# Altium PCB ArmPCB.PcbDoc
Units mil, origin at the board's own origin, x right, y up, seen from the top; angles counter-clockwise.
Board outline 2870 x 2610 mil, 2 copper layers (Top Layer, Bottom Layer); 78 components, 52 nets, 276 pads, 80 vias.
Unrouted connection lines stored in the file: 19.
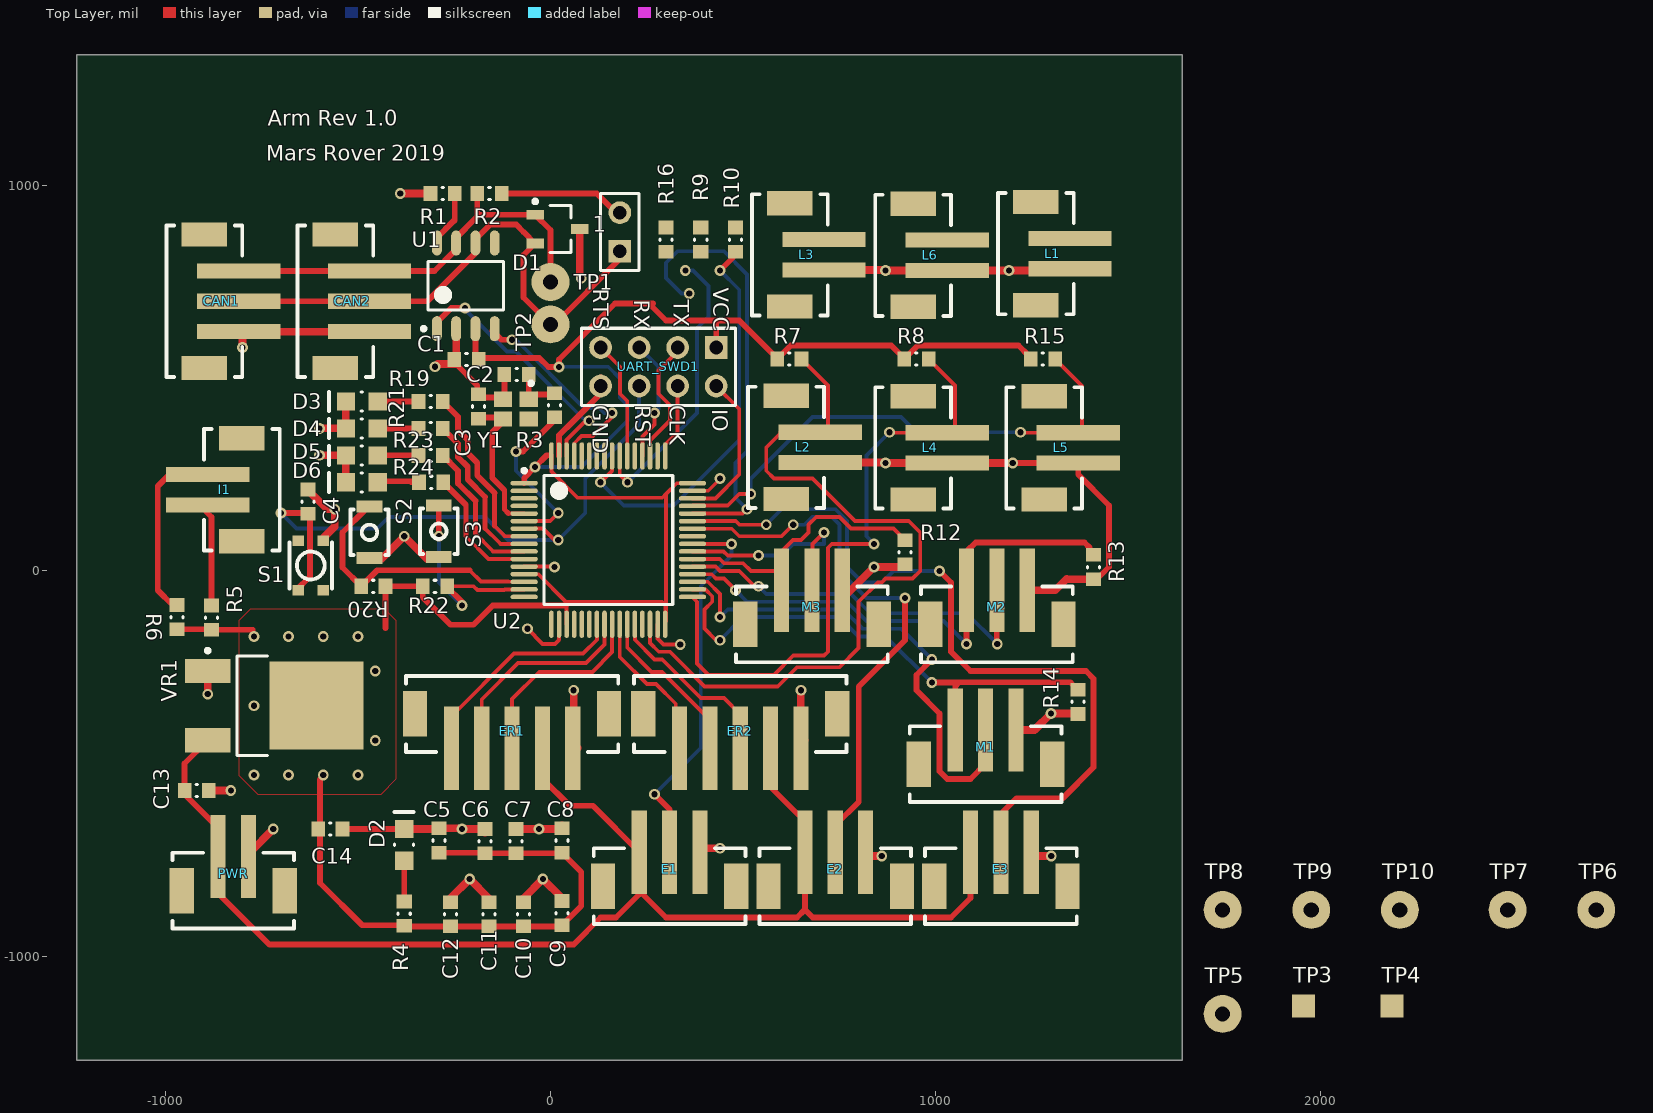
[diagram p0: Top Layer view]
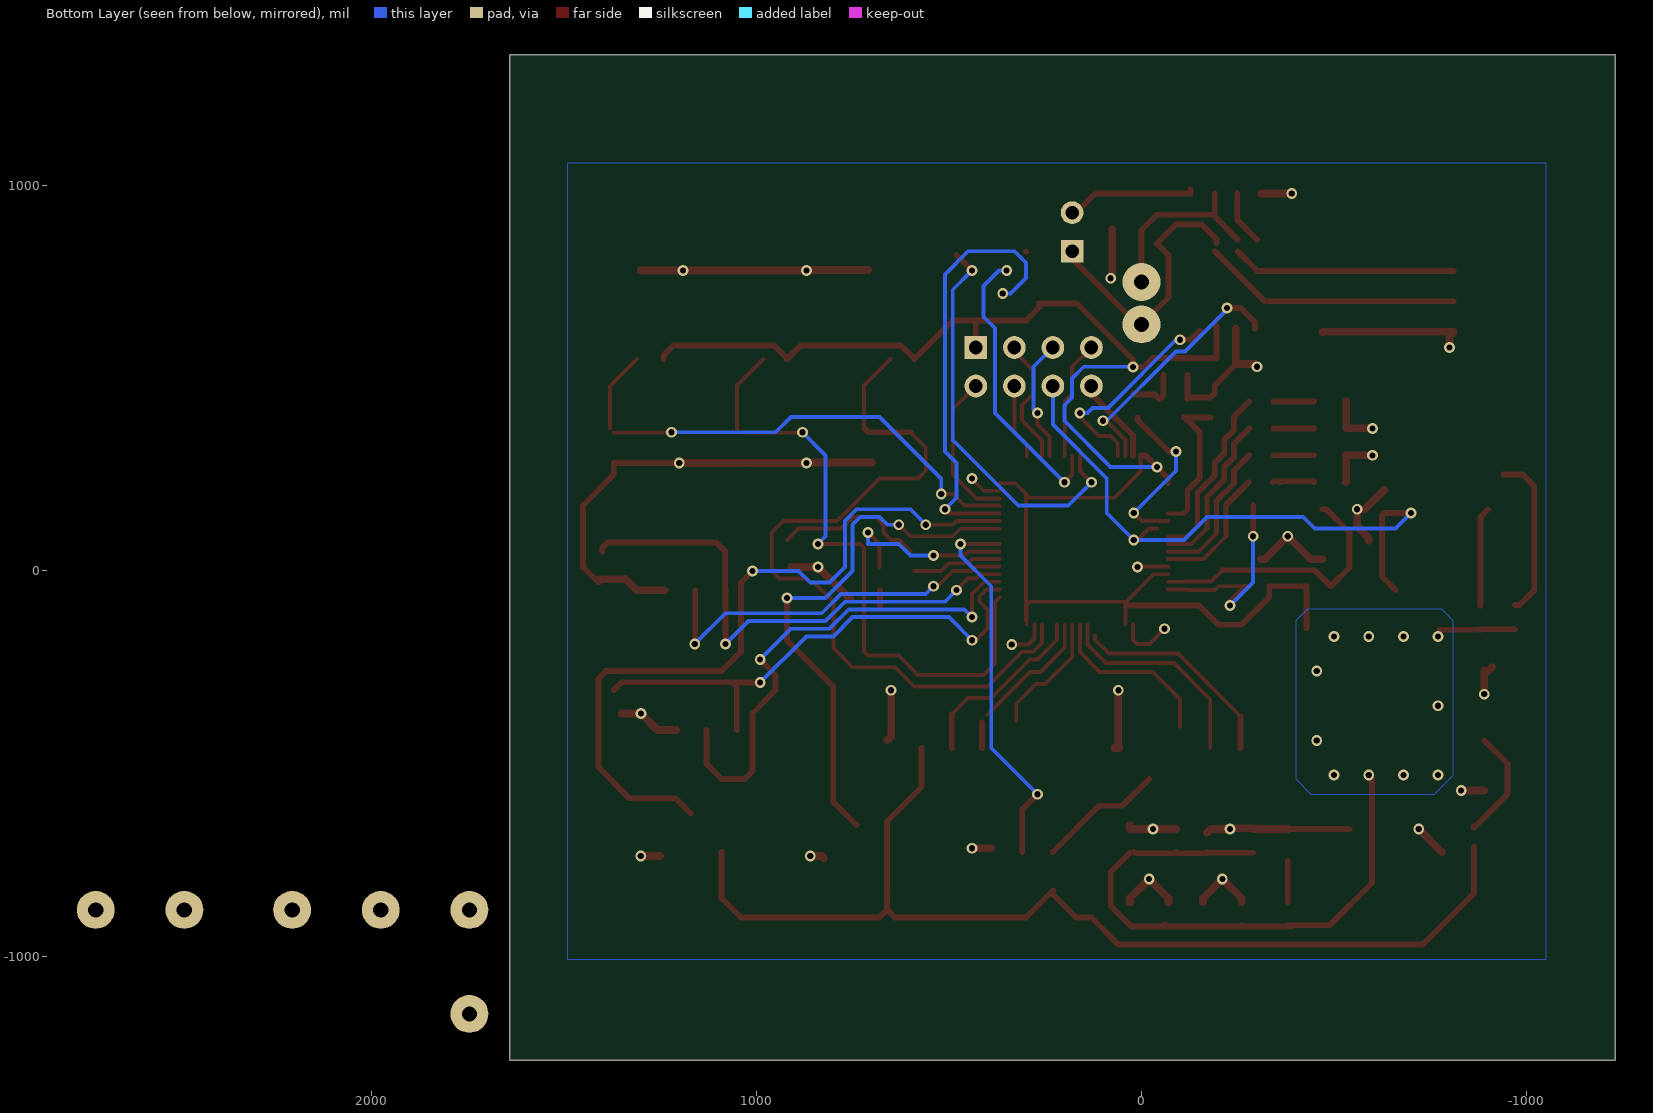
[diagram p1: Bottom Layer view, seen from below]

## Layer stack, top to bottom
Top Solder: solder mask 0.4, Solder Resist, Dk 3.5
Top Layer: signal copper 1.4
Dielectric 1: dielectric 12.6, FR-4, Dk 4.8
Bottom Layer: signal copper 1.4
Bottom Solder: solder mask 0.4, Solder Resist, Dk 3.5

## Board outline
-1230,-1270 1640,-1270 1640,1340 -1230,1340

## Design rules (kind name [scope] priority, off if disabled: settings)
Clearance [All] p1: gap=10 ignorepadtopadclearanceinfootprint=FALSE except(0: Arc-Hole Track-Hole SMDPad-Hole THPad-Hole Via-Hole Fill-Hole Poly-Hole Region-Hole Text-Hole; 8: Arc-SMDPad Track-SMDPad)
HoleSize [All] p1: absolutevalues=TRUE maxlimit=120 minlimit=1 maxpercent=80.000 minpercent=20.000
MinimumSolderMaskSliver [All] p1: minsoldermaskwidth=1
PolygonConnect [All] p1: connectstyle=Direct reliefconductorwidth=10 reliefentries=4 polygonreliefangle="90 Angle" airgapwidth=10
RoutingVias [All] p1: holewidth=28 width=50 viastyle="Through Hole" minholewidth=16 minwidth=28 maxholewidth=28 maxwidth=50
SilkToSolderMaskClearance [IsPad] p1: minsilkscreentomaskgap=5 clearancetoexposedcopper=TRUE
SolderMaskExpansion [All] p1: expansion=4
Width [All] p1: maxlimit=20 minlimit=10 preferedwidth=15 bottomlayer_maxwidth=10 bottomlayer_prefwidth=10 minimp=50.000000 maximp=50.000000 favimp=50.000000
27 further rules are at their usual default settings.

## Classes and differential pairs
component class POWER: C13 C14 D2 R4 TP3 TP4 TP5 VR1
component class Support: D3 D4 D5 D6 R5 R6 R7 R8 R9 R10 R12 R13 R14 R15 R16 R19 R20 R21 R22 R23 R24 S2 S3 TP3 TP6 TP7 TP8 TP9 TP10
component class MCU: C2 C3 C4 C5 C6 C7 C8 C9 C10 C11 C12 R3 S1 U2 Y1
component class Connectors: CAN1 CAN2 E1 E2 E3 ER1 ER2 I1 I2C L1 L1A L1B L2 L2A L2B L3 L3A L3B L4 L5 L6 M1 M2 M3 PWR PWR3 PWR5
component class CAN: 1 C1 D1 R1 R2 TP1 TP2 TP? U1 U3

## Components (designator, comment, footprint, x,y, rotation, side; value= is the part's Value field where it differs from the comment)
1 "Header 2" HDR1X2 180,830 r90 top
C1 "CAP_0.1uF_16V_0603" CAPC0603(1608)55_N -218.19,548.9 r0 top value=0.1uF
C2 "CAP_15pF_0603" CAPC0603(1608)55_N -88.27,509.53 r0 top value=15pF
C3 "CAP_15pF_0603" CAPC0603(1608)55_N -186.69,426.85 r270 top value=15pF
C4 "CAP_0.1uF_16V_0603" CAPC0603(1608)55_N -630,180 r270 top value=0.1uF
C5 "CAP_0.1uF_16V_0603" CAPC0603(1608)55_N -290,-700 r270 top value=0.1uF
C6 "CAP_0.1uF_16V_0603" CAPC0603(1608)55_N -170,-701.5 r270 top value=0.1uF
C7 "CAP_0.1uF_16V_0603" CAPC0603(1608)55_N -90,-701.5 r270 top value=0.1uF
C8 "CAP_4.7uF_0603" CAPC0603(1608)55_N 30,-700 r270 top value=4.7uF
C9 "CAP_0.1uF_16V_0603" CAPC0603(1608)55_N 30,-888.5 r270 top value=0.1uF
C10 "CAP_0.1uF_16V_0603" CAPC0603(1608)55_N -70,-891.5 r270 top value=0.1uF
C11 "CAP_10nF_0603" CAPC0603(1608)55_N -160,-891.5 r270 top value=10nF
C12 "CAP_1uF_16V_0603" CAPC0603(1608)55_N -260,-891.5 r270 top value=1uF
C13 "CAP_0.33uF_16V_0603" CAPC0603(1608)55_N -918.5,-570 r180 top value=0.33uF
C14 "CAP_10uF_0603_POL" CAPC0603(1608)55_N -571.5,-670 r0 top value=10uF
CAN1 "CON_3M_PH_TOP_SMT" JST-B3B-SM4-TB -997.01,700 r270 top
CAN2 "CON_3M_PH_TOP_SMT" JST-B3B-SM4-TB -657.01,700 r270 top
D1 "TVS_DIODE_CAN" TVS_DIODE_CAN 18.07,887.4 r0 top
D2 "DIO_LED_R" LED_0805_LINE -380,-711.34 r90 top
D3 "DIO_LED_Y" LED_0805_LINE -490,440 r180 top
D4 "DIO_LED_G" LED_0805_LINE -490,370 r180 top
D5 "DIO_LED_G" LED_0805_LINE -490,300 r180 top
D6 "DIO_LED_G" LED_0805_LINE -490,230 r180 top
E1 "CON_3M_PH_TOP_SMT" JST-B3B-SM4-TB 309.25,-917.01 r0 top
E2 "CON_3M_PH_TOP_SMT" JST-B3B-SM4-TB 739.25,-917.01 r0 top
E3 "CON_3M_PH_TOP_SMT" JST-B3B-SM4-TB 1169.25,-917.01 r0 top
ER1 "CON_5M_PH_TOP_SMT" JST-B5B-SM4-TB -100,-272.99 r180 top
ER2 "CON_5M_PH_TOP_SMT" JST-B5B-SM4-TB 492.52,-272.99 r180 top
I1 "CON_2M_PH_TOP_SMT" JST-B2B-SM4-TB -702.99,210.63 r90 top
L1 "CON_2M_PH_TOP_SMT" JST-B2B-SM4-TB 1161.57,823.86 r270 top
L2 "CON_2M_PH_TOP_SMT" JST-B2B-SM4-TB 512.99,320.63 r270 top
L3 "CON_2M_PH_TOP_SMT" JST-B2B-SM4-TB 522.99,820.63 r270 top
L4 "CON_2M_PH_TOP_SMT" JST-B2B-SM4-TB 842.99,319.37 r270 top
L5 "CON_2M_PH_TOP_SMT" JST-B2B-SM4-TB 1182.99,319.37 r270 top
L6 "CON_2M_PH_TOP_SMT" JST-B2B-SM4-TB 842.99,819.37 r270 top
M1 "CON_3M_PH_TOP_SMT" JST-B3B-SM4-TB 1129.49,-600 r0 top
M2 "CON_3M_PH_TOP_SMT" JST-B3B-SM4-TB 1158.74,-237.01 r0 top
M3 "CON_3M_PH_TOP_SMT" JST-B3B-SM4-TB 678.74,-237.01 r0 top
PWR "CON_2M_PH_TOP_SMT" JST-B2B-SM4-TB -823.86,-928.43 r0 top
R1 "RES_0R_0603" RESC0603(1608)_N -280,980 r180 top value=0R
R2 "RES_120R_0603" RESC0603(1608)_N -158.5,980 r0 top value=120R
R3 "RES_0R_0603" RESC0603(1608)_N 10,430 r90 top value=0R
R4 "RES_100R_0603" RESC0603(1608)_N -380,-890 r270 top value=100R
R5 "RES_4K7_0603" RESC0603(1608)_N -880,-121.5 r270 top value=4K7
R6 "RES_4K7_0603" RESC0603(1608)_N -970,-120 r270 top value=4K7
R7 "RES_10K_0603" RESC0603(1608)_N 620,550 r180 top value=10K
R8 "RES_10K_0603" RESC0603(1608)_N 950,550 r180 top value=10K
R9 "RES_10K_0603" RESC0603(1608)_N 390,860 r90 top value=10K
R10 "RES_10K_0603" RESC0603(1608)_N 480,860 r90 top value=10K
R12 "RES_10K_0603" RESC0603(1608)_N 920,48.5 r90 top value=10K
R13 "RES_10K_0603" RESC0603(1608)_N 1410,10 r90 top value=10K
R14 "RES_10K_0603" RESC0603(1608)_N 1369.49,-340 r90 top value=10K
R15 "RES_10K_0603" RESC0603(1608)_N 1278.5,550 r180 top value=10K
R16 "RES_10K_0603" RESC0603(1608)_N 300,860 r90 top value=10K
R19 "RES_100R_0603" RESC0603(1608)_N -311.5,440 r180 top value=100R
R20 "RES_10K_0603" RESC0603(1608)_N -460,-40 r0 top value=10K
R21 "RES_100R_0603" RESC0603(1608)_N -311.5,370 r180 top value=100R
R22 "RES_10K_0603" RESC0603(1608)_N -300,-40 r0 top value=10K
R23 "RES_100R_0603" RESC0603(1608)_N -311.5,300 r180 top value=100R
R24 "RES_100R_0603" RESC0603(1608)_N -310,230 r180 top value=100R
S1 "SW_PWR" PTS830GM140 -622.48,13.98 r270 top
S2 "SW_TACTILE" B3U-1100P -470,100 r270 top
S3 "SW_TACTILE" B3U-1100P -290,103.07 r270 top
TP1 "CAN_H" TESTPOINT_LOOP 0,750 r90 top
TP2 "CAN_L" TESTPOINT_LOOP 0,640 r90 top
TP3 "+5V0" TESTPOINT 1955,-1130 r90 top
TP4 "+3V3" TESTPOINT 2185,-1130 r90 top
TP5 "GND" TESTPOINT_LOOP 1745,-1150 r0 top
TP6 "I2C_SDA" TESTPOINT_LOOP 2715,-880 r0 top
TP7 "I2C_SCL" TESTPOINT_LOOP 2485,-880 r0 top
TP8 "UART_TX" TESTPOINT_LOOP 1745,-880 r0 top
TP9 "UART_RX" TESTPOINT_LOOP 1975,-880 r0 top
TP10 "UART_RTS" TESTPOINT_LOOP 2205,-880 r90 top
U1 "IC TXRX CAN" LTC2875 -220,740 r90 top
U2 "STM32F091RC" STM_LQFP64_N 150,80 r0 top
UART_SWD1 "HEADER 4X2" HEADER_2X4 430,580 r180 top
VR1 "5V0_3V3_LDO" VOLTAGE_REGULATOR -780.16,-349.96 r270 top
Y1 "CRYSTAL_32MHZ" AVX-CX2520DB32000D0GEJZ1-4_V -90,420 r270 top

## Footprints (in the part's own frame and the unit in brackets; to place one, negate y for a bottom-side part, rotate by r counter-clockwise, add the part's x,y. Pads: shape width x height; smd on the part's side, far side on the other; paste and mask are expansions set on the pad)
AVX-CX2520DB32000D0GEJZ1-4_V [mm] "Hand Drawn, 4-Leads,Body 2.5x2mm"
  rect 1x1.2 smd: 1(-0.65,0.85) 2(-0.65,-0.85) 3(0.65,-0.85) 4(0.65,0.85)
  silkscreen extent -1.82,0.88 -1.58,1.13, body extent -1,-1.25 1,1.25, height 0.55
B3U-1100P [mm] "TACTILE SWITCH GREY"
  rect 0.8x1.7 smd: 1(-1.7,0) 2(1.7,0)
  silkscreen extent -1.5,-1.25 1.5,1.25
CAPC0603(1608)55_N [mm] "Chip Capacitor, Body 1.6x0.8mm, Height 0.55mm, IPC Medium Density"
  rect 0.9x1 smd: 1(-0.8,0) 2(0.8,0)
  silkscreen extent -0.05,-0.4 0.05,0.4, body extent -0.87,-0.48 0.88,0.47, height 0.55
HDR1X2 [mm] "Connector; Header; 2 Position"
  rect 1.5x1.5 hole 0.9: 1(0,0)
  round 1.5 hole 0.9: 2(2.54,0)
  silkscreen extent -1.27,-1.27 3.81,1.27
HEADER_2X4 [mm]
  rect 1.5x1.5 hole 0.9: 1(0,0)
  round 1.5 hole 0.9: 2(2.54,0) 3(5.08,0) 4(7.62,0) 5(0,2.54) 6(2.54,2.54) 7(5.08,2.54) 8(7.62,2.54)
  silkscreen extent -1.27,-1.27 8.89,3.81
JST-B2B-SM4-TB [mm]
  rect 1x5.5 smd: 1(-1,4.75) 2(1,4.75)
  rect 1.6x3 smd: 3(-3.4,2.5) 4(3.4,2.5)
  silkscreen extent -4,0 4,5
JST-B3B-SM4-TB [mm]
  rect 1x5.5 smd: 1(-2,4.75) 2(0,4.75) 3(2,4.75)
  rect 1.6x3 smd: 4(-4.4,2.5) 5(4.4,2.5)
  silkscreen extent -5,0 5,5
JST-B5B-SM4-TB [mm]
  rect 1x5.5 smd: 1(-4,4.75) 2(-2,4.75) 3(0,4.75) 4(2,4.75) 5(4,4.75)
  rect 1.6x3 smd: 6(-6.4,2.5) 7(6.4,2.5)
  silkscreen extent -7,0 7,5
LED_0805_LINE [mm] "SMD, 2-Leads, Body 2x1.25mm"
  rect 1.2x1.2 smd: 1(-1.05,0) 2(1.05,0)
  silkscreen extent -0.05,-0.63 2.16,0.64, body extent -1,-0.63 1,0.63, height 0.8
LTC2875 [mm] "SOIC, 8-Leads, Body 5x4mm, Pitch 1.27mm, IPC Low Density"
  oval 1.65x0.65 smd: 1(-2.825,1.905) 2(-2.825,0.635) 3(-2.825,-0.635) 4(-2.825,-1.905) 5(2.825,-1.905) 6(2.825,-0.635) 7(2.825,0.635) 8(2.825,1.905)
  silkscreen extent -2.95,-2.5 1.6,2.9, body extent -3,-2.5 3,2.5, height 1.75
PTS830GM140 [mm] "PWR TACTILE SWITCH (RED)"
  rect 0.7x0.75 smd: 1(-1.625,0.825) 2(1.625,0.825) 3(-1.625,-0.825) 4(1.625,-0.825)
  silkscreen extent -1.53,-1.4 1.53,1.4
RESC0603(1608)_N [mm] "Chip Resistor, Body 1.6x0.8mm, IPC Medium Density"
  rect 0.9x1 smd: 1(-0.8,0) 2(0.8,0)
  silkscreen extent -0.05,-0.4 0.05,0.4, body extent -0.85,-0.47 0.85,0.47, height 0.6
STM_LQFP64_N [mm] "Thin QFP, 64-Leads, Body 10x10mm, Pitch 0.5mm, IPC Medium Density"
  oval 1.8x0.3 smd mask+0.05: 1(-5.55,3.75) 2(-5.55,3.25) 3(-5.55,2.75) 4(-5.55,2.25) 5(-5.55,1.75) 6(-5.55,1.25) 7(-5.55,0.75) 8(-5.55,0.25) 9(-5.55,-0.25) 10(-5.55,-0.75) 11(-5.55,-1.25) 12(-5.55,-1.75) 13(-5.55,-2.25) 14(-5.55,-2.75) 15(-5.55,-3.25) 16(-5.55,-3.75) 33(5.55,-3.75) 34(5.55,-3.25) 35(5.55,-2.75) 36(5.55,-2.25) 37(5.55,-1.75) 38(5.55,-1.25) 39(5.55,-0.75) 40(5.55,-0.25) 41(5.55,0.25) 42(5.55,0.75) 43(5.55,1.25) 44(5.55,1.75) 45(5.55,2.25) 46(5.55,2.75) 47(5.55,3.25) 48(5.55,3.75)
  oval 0.3x1.8 smd mask+0.05: 17(-3.75,-5.55) 18(-3.25,-5.55) 19(-2.75,-5.55) 20(-2.25,-5.55) 21(-1.75,-5.55) 22(-1.25,-5.55) 23(-0.75,-5.55) 24(-0.25,-5.55) 25(0.25,-5.55) 26(0.75,-5.55) 27(1.25,-5.55) 28(1.75,-5.55) 29(2.25,-5.55) 30(2.75,-5.55) 31(3.25,-5.55) 32(3.75,-5.55) 49(3.75,5.55) 50(3.25,5.55) 51(2.75,5.55) 52(2.25,5.55) 53(1.75,5.55) 54(1.25,5.55) 55(0.75,5.55) 56(0.25,5.55) 57(-0.25,5.55) 58(-0.75,5.55) 59(-1.25,5.55) 60(-1.75,5.55) 61(-2.25,5.55) 62(-2.75,5.55) 63(-3.25,5.55) 64(-3.75,5.55)
  silkscreen extent -5.67,-4.25 4.25,4.7, body extent -5,-5 5,5, height 1.6
TESTPOINT [mil]
  rect 60x60 smd: 1(0,0)
TESTPOINT_LOOP [mm]
  round 2.5 hole 1: 1(0,0)
TVS_DIODE_CAN [mm] "SOT23, 3-Leads, Body 2.95x2.80mm, Pitch 0.95mm, IPC Low Density"
  rect 1.15x0.65 smd: 1(-1.475,0.95) 2(-1.475,-0.95) 3(1.475,0)
  silkscreen extent -1.6,-1.55 0.9,1.95, body extent -1.5,-1.55 1.5,1.55, height 1.25
VOLTAGE_REGULATOR [mm] "DPAK, 3-Leads, Body 6.095x6.54mm, Pitch 4.57mm"
  rect 1.6x3 smd: 1(-2.285,-2.79) 3(2.285,-2.79)
  rect 5.8x6.2 smd: 2(0,4.39)
  silkscreen extent -3.76,-2.91 3.27,1.14, body extent -3.27,-0.84 3.27,5.25, height 2.38

## Part data
1: "Header, 2-Pin", LatestRevisionDate=17-Jul-2002, LatestRevisionNote="Re-released for DXP Platform.", Publisher="Altium Limited"
C1 C4 C5 C6 C7 C9 C10: "CAP CER 0.1UF 16V X7R 0603", Digikey Part Number=311-1088-1-ND, Manufacturer=Yageo, MPN=CC0603KRX7R7BB104, Package="0603 (1608 Metric)", Temperature Coefficient=X7R, Voltage Rating=16V, Dimensions="0.063\" L x 0.031\" W (1.60mm x 0.80mm)"
C2 C3: "CAP CER 15PF 250V NPO 0603", Digikey Part Number=311-3282-1-ND, Manufacturer=Yageo, MPN=AC0603JRNPOYBN150, Package="0603 (1608 Metric)", Temperature Coefficient=NP0, Voltage Rating=250v, Dimensions="0.063\" L x 0.031\" W (1.60mm x 0.80mm)"
C8: "CAP CER 4.7UF 6.3V X5R 0603", Digikey Part Number=311-1521-1-ND, Manufacturer=Yageo, MPN=CC0603KRX5R5BB475, Package="0603 (1608 Metric)", Temperature Coefficient=X5R, Voltage Rating=6.3V, Dimensions="0.063\" L x 0.031\" W (1.60mm x 0.80mm)"
C11: "CAP CER 10000PF 16V X7R 0603", Digikey Part Number=311-3369-1-ND, Manufacturer=Yageo, MPN=CC0603KRX7R7BB103, Package="0603 (1608 Metric)", Temperature Coefficient=X7R, Voltage Rating=16V, Dimensions="0.063\" L x 0.031\" W (1.60mm x 0.80mm)"
C12: "CAP CER 1UF 16V Y5V 0603", Digikey Part Number=311-1372-1-ND, Manufacturer=Yageo, MPN=CC0603ZRY5V7BB105, Package="0603 (1608 Metric)", Temperature Coefficient=Y5V, Voltage Rating=16V, Dimensions="0.063\" L x 0.031\" W (1.60mm x 0.80mm)"
C13: "CAP CER 0.33UF 16V X7R 0603", Digikey Part Number=490-6050-1-ND, Manufacturer="Murata Electronics North America", MPN=GCM188R71C334KA37D, Package="0603 (1608 Metric)", Temperature Coefficient=X7R, Voltage Rating=16V, Dimensions="0.063\" L x 0.031\" W (1.60mm x 0.80mm)"
C14: "Capacitor, Tantalum, 10uF 10% 20V MCCT-B (3528)", Digikey Part Number=311-1817-1-ND, Manufacturer=Yageo, MPN=CC0603MRX5R6BB106, Package="0603 (1608 Metric)", Temperature Coefficient=X5R, Voltage Rating=10V, Dimensions="0.063\" L x 0.031\" W (1.60mm x 0.80mm)"
CAN1 CAN2 E1 E2 E3 M1 M2 M3: "CONN HEADER PH TOP 3POS 2MM SMD", Digikey Part Number=455-1735-1-ND, Manufacturer=JST, MPN=B3B-PH-SM4-TB(LF)(SN), ComponentLink1Description=Datasheet, ComponentLink1URL=http://www.jst-mfg.com/product/pdf/eng/ePH.pdf
D1: "TVS DIODE 24V 41V SOT323-3", Digikey Part Number=1727-3891-1-ND, Manufacturer="Nexperia USA Inc.", MPN=PESD2CAN,215, Package="SC-70, SOT-323", ComponentLink1Description=Datasheet, ComponentLink1URL=https://assets.nexperia.com/documents/data-sheet/PESD1CAN-U.pdf
D2: "LED RED DIFFUSED 0805 SMD", Digikey Part Number=475-1278-1-ND, Forward Voltage Drop=2V, Manufacturer=OSRAM, MPN="LS R976-NR-1", Package="0805 (2012 Metric)"
D3: "LED YELLOW DIFFUSED 0805 SMD", Digikey Part Number=475-2560-1-ND, Forward Voltage Drop=2.2V, Manufacturer=OSRAM, MPN="LY R976-PS-36", Package="0805 (2012 Metric)"
D4 D5 D6: "LED GREEN DIFFUSED 0805 SMD", Digikey Part Number=475-1410-1-ND, Forward Voltage Drop=2.2V, Manufacturer=OSRAM, MPN="LG R971-KN-1", Package="0805 (2012 Metric)"
ER1 ER2: "CONN HEADER PH TOP 5POS 2MM SMD", Digikey Part Number=455-1737-1-ND, Manufacturer=JST, MPN=B5B-PH-SM4-TB(LF)(SN), ComponentLink1Description=Datasheet, ComponentLink1URL=http://www.jst-mfg.com/product/pdf/eng/ePH.pdf
I1 L1 L2 L3 L4 L5 L6 PWR: "CONN HEADER PH TOP 2POS 2MM SMD", Digikey Part Number=455-1734-1-ND, Manufacturer=JST, MPN=B2B-PH-SM4-TB, ComponentLink1Description=Datasheet, ComponentLink1URL=http://www.jst-mfg.com/product/pdf/eng/ePH.pdf
R1 R3: "RES SMD 0 OHM JUMPER 1/10W 0603", Digikey Part Number=311-0.0GRCT-ND, Manufacturer=Yageo, MPN=RC0603JR-070RL, Package="0603 (1608 Metric)", Dimensions="0.063\" L x 0.031\" W (1.60mm x 0.80mm)"
R2: "RES SMD 120 OHM 5% 1/10W 0603", Digikey Part Number=311-120GRCT-ND, Manufacturer=Yageo, MPN=RC0603JR-07120RL, Package="0603 (1608 Metric)", Tolerance=5%, Dimensions="0.063\" L x 0.031\" W (1.60mm x 0.80mm)"
R4 R19 R21 R23 R24: "RES SMD 100 OHM 1% 1/10W 0603", Digikey Part Number=311-100HRCT-ND, Manufacturer=Yageo, MPN=RC0603FR-07100RL, Package="0603 (1608 Metric)", Tolerance=1%, Dimensions="0.063\" L x 0.031\" W (1.60mm x 0.80mm)"
R5 R6: "RES SMD 4.7K OHM 5% 1/10W 0603", Digikey Part Number=311-4.7KGRCT-ND, Manufacturer=Yageo, MPN=RC0603JR-074K7L, Package="0603 (1608 Metric)", Tolerance=5%, Dimensions="0.063\" L x 0.031\" W (1.60mm x 0.80mm)"
R7 R8 R9 R10 R12 R13 R14 R15 R16 R20 R22: "RES SMD 10K OHM 5% 1/10W 0603", Digikey Part Number=311-10KGRCT-ND, Manufacturer=Yageo, MPN=RC0603JR-0710KL, Package="0603 (1608 Metric)", Tolerance=5%, Dimensions="0.063\" L x 0.031\" W (1.60mm x 0.80mm)"
S1: "Power Switch (Red)", Digikey Part Number=CKN10587CT-ND, Manufacturer=C&K, MPN="PTS830GM140 SMTR LFS", ComponentLink1Description=Datasheet, ComponentLink1URL=https://www.ckswitches.com/media/1478/pts830.pdf
S2 S3: "Tactile Switch (Grey)", Digikey Part Number=SW1021TR-ND, Manufacturer="Omron Electronics Inc-EMC Div", MPN=B3U-1100P
TP1 TP2 TP5 TP6 TP7 TP8 TP9 TP10: library part TESTPOINT_LOOP, "PC TEST POINT MINIATURE WHITE", Digikey Part Number=36-5002-ND, Manufacturer="Keystone Electronics", MPN=5002
TP3 TP4: library part TESTPOINT_SMD
U1: library part LTC2875, "IC TXRX CAN 4MBPS 8SO", Digikey Part Number=LTC2875IS8#PBF-ND, Manufacturer="Linear Technologies", MPN=LTC2875IS8#PBF, Package="8-SOIC (0.154\", 3.90mm Width)", ComponentLink1Description=Datasheet, ComponentLink1URL=https://www.analog.com/media/en/technical-documentation/data-sheets/2875f.pdf
U2: Digikey Part Number=497-15167-ND, Manufacturer=STMicroelectronics, Package=64-LQFP, ComponentLink1Description=Datasheet, ComponentLink1URL=https://www.st.com/content/ccc/resource/technical/document/datasheet/95/3c/2e/5b/21/09/45/a6/DM00115237.pdf/files/DM00115237.pdf/jcr:content/translations/en.DM00115237.pdf#%5B%7B%22num%22%3A96%2C%22gen%22%3A0%7D%2C%7B%22name%22%3A%22XYZ%22%7D%2C67%2C755%2Cnull%5D, MPN=STM32F091RC
UART_SWD1: "Header, 4-Pin Dual row", Digikey Part Number=S9015E-04-ND, Manufacturer="Sullins Connector Solutions", MPN=GRPB042VWVN-RC
VR1: "IC REG LINEAR 3.3V 1A DPAK", Current Output=1A, Digikey Part Number=NCP1117DT33T5GOSCT-ND, Manufacturer="ON Semiconductor", MPN=NCP1117DT33T5G
Y1: "CRYSTAL 32MHZ 8PF SMD", Digikey Part Number=1253-1730-1-ND, Manufacturer="Kyocera International Inc. Electronic Components", MPN=CX2520DB32000D0GPSC1, Package="4-SMD, No Lead", Dimensions="0.098\" L x 0.079\" W (2.50mm x 2.00mm)"

## Via types
v1: diameter 28, hole 16, Top Layer to Bottom Layer, tented both sides, 69 vias
v2: diameter 28, hole 16, Top Layer to Bottom Layer, 11 vias

## Nets (pads, with @x,y where several pads share a name; then routed paths per layer and width w, separated by ;. In a path a pad name is that pad's centre, name@x,y a point inside that pad or via, vN(x,y) a via of type N, cw(c..) or ccw(c..) an arc to the next point about the centre after c; other vN are vias at no path point)
+3V3: C1.2 C5.2 C6.2 C7.2 C8.2 C9.2 C10.2 C11.2 C12.2 C14.1 R4.2 R5.2 R6.2 R7.2 R8.2 R9.2 R10.2 R15.2 R16.2 R20.2 R22.1 TP4.1 U1.3 U2.1 U2.13 U2.19 U2.32 U2.48 U2.64 UART_SWD1.1 VR1.2 | length 6135.3
  Top Layer w10: U2.13 -31.42,-8.58 41.73,-81.73 ; U2.64 2.36,257.64 70,190 290,190 300,200 ; U2.19 41.73,-81.73 ; U2.32 297.64,-87.64 290,-80 41.73,-80 41.73,-81.73 ; U2.32@300,-130 300,200 ; U2.48 327.64,227.64 300,200
  Top Layer w15: R6.2 -881.5,-151.5 R5.2@-880,-150 ; R5.2 -772.99,-152.99 ; -598.74,-541.26 -598.74,-810 -488.74,-920 -385.98,-920 R4.2@-382.99,-922.99 ; -428.5,-148.5 R20.2 R22.1 -331.5,-68.5 -260,-140 -200,-140 -150,-90 40,-90 ; R4.2@-390,-922.99 R4.2@-382.99,-922.99 ; R4.2@-380,-920 R4.2@-382.99,-922.99 ; C5.2 -171.5,-731.5 C6.2@-170,-730 ; C12.2 C11.2 C10.2 27.01,-922.99 C9.2 80,-870 80,-781.5 C8.2 ; C12.2@-260,-920 -262.99,-922.99 R4.2@-382.99,-922.99 ; C1.2@-195,552.83 U1.3 U1.3@-195,636.65 ; C1.2@-186.69,552.83 -29.21,552.83 -5.59,529.21 v1(21.97,529.21) 21.97,548.9 167.64,694.57 264.81,694.57 266.06,694.57 ; C6.2 -92.99,-732.99 C7.2@-90,-730 ; C7.2 17.01,-732.99 C8.2@20,-730 ; U2.1 -68.5,241.5 v1(-40,270) -10,300 U2.64@0,300 ; 264.81,685.19 300,650 430,650 ; UART_SWD1.1@435.35,588.27 430,582.91 430,650 ; R7.2 R7.2@589.25,550.75 ; R7.2@590,550 R7.2@589.25,550.75 ; R8.2@920,550 R8.2@919.25,550.75 ; R15.2@1240,550 1240,560 1214.81,585.19 953.69,585.19 R8.2@919.25,550.75 ; 430,650 490,650 R7.2@589.25,550.75 ; R7.2@589.25,550.75 623.69,585.19 884.81,585.19 R8.2@918.5,551.5 ; R8.2@918.5,551.5 R8.2@919.25,550.75 ; R8.2@918.5,551.5 R8.2 R8.2@919.25,550.75
  Top Layer w20: C10.2@-61.5,-921.5 C10.2@-60,-920
  Bottom Layer w10: v1(-40,270) 80,270 200,390 200,430 180,450 180,500 150,530 v1@18.82,530
  other v2: -770,-530 -680,-530 -590,-530 -500,-530 -455,-440 -770,-350 -455,-260 -770,-170 -680,-170 -590,-170 -500,-170
+5V0: C13.2 E1.1 E2.1 E3.1 ER1.2 ER2.2 PWR.1 TP3.1 VR1.3 | length 3434.7
  Top Layer w15: VR1.3@-890,-440 -950,-500 -950,-580 -863.23,-666.77 PWR.1@-863.23,-663.23 ; PWR.1@-863.23,-716.77 PWR.1 -863.23,-836.77 -730,-970 60,-970 130,-900 170,-900 230,-840 ; ER1.2@-20,-540 50,-610 110,-610 E1.1@230,-730 ; E1.1@230,-830 300,-900 640,-900 660,-880 ; ER2.2 571.26,-561.26 660.51,-650.51 E2.1 E2.1@660.51,-820.51 ; E2.1@660.51,-830.51 660.51,-879.49 681.02,-900 1040,-900 1090.51,-849.49 E3.1
BUTTON_1: R20.1 S2.1 U2.14 | length 715
  Top Layer w10: -210,1.82 -180.68,-27.5 -110.67,-27.5 ; -118.27,-28.27 U2.14
  Top Layer w15: S2.1@-470,160 -480,160 -540,100 -540,8.5 R20.1 -449.67,1.82 -210,1.82
BUTTON_2: R22.2 S3.1 U2.15 | length 555
  Top Layer w10: R22.2 -200,-40 -190,-50 -120,-50 ; -117.95,-47.95 U2.15
  Top Layer w15: v1(-290,90) S3.1 ; R22.2@-270,-40 R22.2@-268.5,-41.5 ; R22.2 R22.2@-268.5,-41.5 ; v1(-230,-90) -230,-80 R22.2@-268.5,-41.5
  Bottom Layer w10: v1(-290,90) -290,-30 v1(-230,-90)
GND: C1.1 C2.1 C3.1 C4.1 C5.1 C6.1 C7.1 C8.1 C9.1 C10.1 C11.1 C12.1 C13.1 C14.2 CAN1.3 CAN2.3 D1.3 D2.2 D3.2 D4.2 D5.2 D6.2 E1.3 E2.3 E3.3 ER1.1 ER2.1 L1.2 L2.2 L3.2 L4.2 L5.2 L6.2 M1.3 M2.3 M3.3 PWR.2 R1.2 R12.1 R13.1 R14.1 S1.1 S2.2 S3.2 TP5.1 U1.2 U2.12 U2.18 U2.31 U2.47 U2.63 UART_SWD1.8 VR1.1 Y1.2 | length 5930.1
  Top Layer w10: U2.12 v1@18.9,11.1 ; v1(-60,-150) -20.56,-189.44 11.23,-189.44 20.33,-180.33 ; 22.05,-177.95 U2.18 ; U2.31 277.95,-175.59 293.62,-191.26 v1(336.93,-191.26) ; U2.47 409.37,207.95 v1@439.29,237.87
  Top Layer w15: C14.2 D2.2 ; C1.1@-245.75,537.09 -190,481.34 -190,461.5 -178.5,450 Y1.2@-119.76,450 ; Y1.2@-119.76,446.54 Y1.2@-119.76,450 ; C2.1 Y1.2@-119.76,450 ; U2.63 21.97,298.58 21.97,351.97 60,390 60,390.08 130,460.08 UART_SWD1.8 ; v1(1200,280) L5.2 1370,250 1450,170 1450,10 R13.1@1410,-30
  Top Layer w20: VR1.1@-910,-250 VR1.1@-900,-260 ; C13.1@-890,-570 C13.1 v1(-830,-570) ; v1(-890,-320) VR1.1 ; v1(-800,580) -800,610 -810,620 CAN1.3 -471.26,621.26 CAN2.3@-470,620 ; PWR.2@-780,-730 v1(-720,-670) ; C4.1@-630,210 -580,160 v1(-560,160) -560,115.36 -590,85.36 S1.1 ; v1(-600,300) D5.2 ; v1(-600,370) D4.2 D3.2 ; D6.2@-530,230 -531.34,231.34 D5.2 ; D5.2@-530,300 D5.2 ; S2.2@-470,30 -440,30 v1(-380,90) -320,30 S3.2@-310,30 ; D2.2 C5.1@-290,-670 ; v1@-380,980 R1.2 ; v1(-300,530) -292.91,537.09 C1.1@-245.75,537.09 ; C5.1 -231.5,-668.5 v1(-230,-670) -180,-670 C6.1@-170,-680 ; C12.1 -260,-850 v1(-210,-800) -160,-850 C11.1 ; C1.1@-250,540 -245,545 U1.2 ; C7.1 v1(-30,-670) 30,-670 C8.1 C8.1@30,-660 ; C10.1 -70,-850 v1(-20,-800) 30,-850 C9.1 30,-860 C9.1@28.5,-858.5 ; ER1.1 70,-460 60,-450 v1(60,-310) ; D1.3 76.14,763.86 v1(80,760) ; UART_SWD1.8 UART_SWD1.8@130,500 ; E1.3@390.51,-720 v1(440,-720) ; v1(650,-310) 650,-430 ER2.1@660,-440 ; L2.2 868.74,281.26 v1(870,280) L4.2@1020,280 ; L3.2 868.74,781.26 v1(870,780) L6.2 v1(1190,780) L1.2@1300,780 ; M3.3@754.49,-75 v1(839.49,10) R12.1@909.49,10 ; E2.3@825.26,-745.26 830.51,-740 v1(860,-740) ; L4.2 v1(1200,280) ; M1.3 1256.5,-412.99 v1(1299.49,-370) 1349.49,-370 ; M2.3@1238.23,-50 1310,-50 1340,-20 ; E3.3@1250.26,-740.26 1250.51,-740 v1(1300,-740) ; 1341.5,-21.5 R13.1
  other v1: 10,10 440,240 -390,980
I2C_SCL: I1.2 R6.1 TP7.1 | length 428.4
  Top Layer w15: R6.1 -981.5,-88.5 -1020,-50 -1020,220 -990,250 I1.2@-940,250
I2C_SDA: I1.1 R5.1 TP6.1 | length 258.3
  Top Layer w15: I1.1@-900,160 -880,140 R5.1
LED_1: R19.1 U2.8 | length 464.8
  Top Layer w10: -145,116.82 -120.84,92.66 ; -120,89.84 U2.8
  Top Layer w13: -145,116.82 -145,202.56
  Top Layer w15: R19.1 -240,400 -240,365.36 -215,340.36 -215,305.71 -190,280.71 -190,247.56 -145,202.56
LED_2: R21.1 U2.9 | length 419.4
  Top Layer w10: -170,110 -132.97,72.97 ; -130,70.16 U2.9
  Top Layer w13: -170,110 -170,192.21
  Top Layer w15: R21.1 -240,330 -240,295.36 -215,270.36 -215,237.21 -170,192.21
LED_3: R23.1 U2.10 | length 381.4
  Top Layer w10: -195,96.82 -151.47,53.29 ; -150,50.47 U2.10
  Top Layer w13: -195,96.82 -195,181.85
  Top Layer w15: R23.1 -240,260 -240,226.85 -195,181.85
LED_4: R24.1 U2.11 | length 340.3
  Top Layer w10: -220,90 -160.79,30.79 U2.11
  Top Layer w13: -220,90 -220,171.5
  Top Layer w15: R24.1 -220,171.5
LIM_1A: L2.1 R7.1 U2.30 | length 1997.2
  Top Layer w10: U2.30 258.27,-187.4 280.87,-210 310,-210 400,-300 590,-300 640,-250 750,-250 800,-200 800,-80 850,-30 860,-30 870,-20 940,-20 960,0 960,100 930,130 790,130 680,240 580,240 560,260 560,320 L2.1@600,360 ; R7.1 720,481.5 L2.1@720,370
  Top Layer w15: L2.1@600,360 L2.1 ; L2.1@710,360 L2.1@720,370
LIM_1B: L4.1 R8.1 U2.33 | length 1629.7
  Top Layer w10: U2.33@368.5,-68.5 380,-80 380,-240 410,-270 580,-270 630,-220 710,-220 720,-210 720,60 730,70 v1(840,70) ; v1@881.26,358.74 L4.1 ; R8.1 1050,481.5 L4.1@1050,370
  Top Layer w15: v1(880,360) v1@881.26,358.74
  Bottom Layer w10: v1(840,70) 820,90 820,300 v1(880,360)
LIM_2A: L1.1 R9.1 U2.55 | length 750.5
  Top Layer w10: U2.55 179.53,250.47 v1(200,230)
  Bottom Layer w10: v1(200,230) 380,410 380,630 410,660 410,740 370,780 v1(350,780)
LIM_2B: L3.1 R10.1 U2.56 | length 1053.4
  Top Layer w10: v1(130,230) 159.84,259.84 U2.56
  Top Layer w15: v1(440,780) R10.1@480,820
  Bottom Layer w10: v1(130,230) 190,170 320,170 490,340 490,730 v1(440,780)
LIM_3A: L5.1 R16.1 U2.44 | length 1146.3
  Top Layer w10: U2.44 421.1,148.9 498.9,148.9 v1(510,160)
  Top Layer w15: R16.1 R16.1@300,830
  Bottom Layer w10: v1(360,720) 340,720 300,760 300,800 330,830 450,830 510,770 510,310 480,280 480,190 v1(510,160)
LIM_3B: L6.1 R15.1 U2.45 | length 1346.9
  Top Layer w10: U2.45 369.92,170 450,170 460,170 490,200 v1(520,200) ; v1@1221.26,358.74 1370,358.74 ; R15.1 1380,480 1380,370
  Top Layer w15: v1(1220,360) v1@1221.26,358.74
  Bottom Layer w10: v1(520,200) 520,240 680,400 910,400 950,360 v1(1220,360)
Net1_1: 1.1 CAN1.2 CAN2.2 D1.2 TP2.1 U1.6 | length 1395.5
  Top Layer w15: CAN1.2 CAN2.2 -320,700 U1.6@-190,830 ; U1.6 -195,860.92 -156.72,899.2 -89.2,899.2 -70,880 ; -69.2,879.2 D1.2 -70,820 -70,710 TP2.1 10,640 180,810 1.1
Net1_2: 1.2 R2.2 | length 320.7
  Top Layer w15: R2.2 120,980 1.2@170,930 ; R2.2@-127.01,987.01 R2.2@-127.01,990
NetC2_2: C2.2 R3.2 Y1.1 | length 135.3
  Top Layer w15: C2.2 -56.77,454.41 Y1.1@-52.83,450.47 ; Y1.1@-46.53,445.59 -33.78,458.35 18.35,458.35 R3.2@21.5,461.5
NetC3_2: C3.2 U2.5 Y1.3 | length 395.3
  Top Layer w10: -108.9,148.9 U2.5
  Top Layer w13: -120,210 -120,160 -108.9,148.9
  Top Layer w15: C3.2@-180,398.5 Y1.3@-111.5,398.5 ; -120,210 -151.26,241.26 -151.26,359.92 -121.18,390 -120,390 Y1.3@-111.5,398.5 ; Y1.3@-110,400 Y1.3@-111.5,398.5
NetC4_2: C4.2 S1.4 U2.7 UART_SWD1.7 | length 1608.6
  Top Layer w10: U2.7@-40,110 -20,110 v1@10,80
  Top Layer w15: v1(-700,150) C4.2@-630,150 ; S1.4@-660,-50 -624.7,-14.7 -624.7,143.2 C4.2
  Bottom Layer w10: v1(-700,150) -660,110 -450,110 -420,140 -170,140 -110,80 v1(20,80) 90,150 90,240 230,380 UART_SWD1.7
NetCAN1_1: CAN1.1 CAN2.1 D1.1 R2.1 TP1.1 U1.7 | length 1060.1
  Top Layer w15: CAN1.1 -471.26,778.74 CAN2.1@-470,780 ; CAN2.1 -301.26,778.74 U1.7@-250,830 ; U1.7@-250,860 -190,920 -190,930 ; R2.1 -190,930 ; TP1.1@0,760 0,884.8 D1.1 -184.8,924.8 -190,930
NetD2_1: D2.1 R4.1 | length 107.3
  Top Layer w15: R4.1@-380,-860 D2.1
NetD3_1: D3.1 R19.2 | length 108.7
  Top Layer w15: D3.1 R19.2 ; -362.99,440 R19.2@-360,440
NetD4_1: D4.1 R21.2 | length 108.7
  Top Layer w15: D4.1 R21.2 ; -362.99,370 R21.2@-360,370
NetD5_1: D5.1 R23.2 | length 108.7
  Top Layer w15: D5.1 R23.2 ; -362.99,300 R23.2@-360,300
NetD6_1: D6.1 R24.2 | length 110.7
  Top Layer w15: D6.1 -446.16,232.5 -344,232.5 R24.2 ; -361.5,230 -360,230
NetE1_2: E1.2 U2.40 | length 1000.7
  Top Layer w10: U2.40 449.84,70.16 v1@469.84,70.16
  Top Layer w15: v1(270,-580) 309.25,-619.25 E1.2 ; v1@469.84,70.16 v1(470,70)
  Bottom Layer w10: v1(270,-580) 390,-460 390,-40 470,40 v1(470,70)
NetE2_2: E2.2 U2.42 | length 1402.1
  Top Layer w10: U2.42 470.47,109.53 490,90 600,90 v1(630,120)
  Top Layer w15: E2.2@740,-660 800,-600 800,-300 920,-180 v1(920,-70)
  Bottom Layer w10: v1(630,120) 660,120 680,140 730,140 750,120 750,0 820,-70 v1(920,-70)
NetE3_2: E3.2 U2.43 | length 1964.4
  Top Layer w10: U2.43 480.79,129.21 490,120 v1(560,120)
  Top Layer w15: v1(1010,0) 1040,-30 1040,-210 1090,-260 1390,-260 1410,-280 1410,-510 1330,-590 1210,-590 E3.2@1170,-630
  Bottom Layer w10: v1(560,120) 600,160 740,160 770,130 770,10 810,-30 860,-30 890,0 v1(1010,0)
NetER1_3: ER1.3 U2.25 | length 453.7
  Top Layer w10: ER1.3@-100.08,-403.86 -100.08,-332.99 -29.21,-262.13 108.58,-262.13 159.84,-210.87 U2.25
NetER1_4: ER1.4 U2.24 | length 555.2
  Top Layer w10: ER1.4 -178.74,-334.1 -84.08,-239.44 91.9,-239.44 140.08,-191.26 ; 140.16,-189.84 U2.24
NetER1_5: ER1.5 U2.23 | length 554.2
  Top Layer w10: ER1.5@-257.48,-377.48 -94.44,-214.44 21.58,-214.44 22.03,-214.88 84.21,-214.88 120.39,-178.7 U2.23@120.39,-167.64
  Top Layer w15: ER1.5 ER1.5@-257.48,-377.48
NetER2_3: ER2.3 U2.28 | length 479.9
  Top Layer w10: 218.9,-178.9 U2.28 ; 220.28,-180 270.28,-230 290,-230 390,-330 450,-330 ER2.3@492.52,-372.52
  Top Layer w15: ER2.3 ER2.3@492.52,-372.52
NetER2_4: ER2.4 U2.27 | length 399.4
  Top Layer w10: U2.27 199.21,-199.21 262.13,-262.13 289.69,-262.13 ER2.4@399.92,-372.36
  Top Layer w15: ER2.4 ER2.4@413.78,-393.78
NetER2_5: ER2.5 U2.26 | length 323.7
  Top Layer w10: U2.26 179.53,-222.83 250.32,-293.62 273.94,-293.62 325.12,-344.8 ER2.5@325.12,-388.11
NetM1_1: M1.1 R14.2 U2.34 | length 1365.4
  Top Layer w10: U2.34 402.28,-47.95 420,-65.67 420,-80 400,-100 400,-150 430,-180 v1(440,-180)
  Top Layer w15: v1(990,-290) 1060,-290 ; M1.1 1050.75,-299.25 1060,-290 ; R14.2@1370,-310 1350,-290 1350,-289.22 1060.78,-289.22 1060,-290
  Bottom Layer w10: v1(440,-180) 500,-120 750,-120 800,-170 870,-170 v1(990,-290)
NetM1_2: M1.2 U2.35 | length 1319.8
  Top Layer w10: U2.35 408.27,-28.27 440,-60 v1(440,-120)
  Top Layer w15: v1(990,-230) 950,-270 950,-310 1010,-370 1010,-520 1030,-540 1090,-540 1129.49,-500.51 M1.2
  Bottom Layer w10: v1(440,-120) 460,-100 760,-100 810,-150 910,-150 v1(990,-230)
NetM2_1: M2.1 R13.2 U2.36 | length 1371.9
  Top Layer w10: U2.36 418.58,-8.58 430,-20 450,-20 v1(480,-50)
  Top Layer w15: v1(1080,-190) M2.1 ; M2.1@1080.75,-50 1080.75,50.75 1103.77,73.77 1386.23,73.77 1400,60 R13.2@1400,50
  Bottom Layer w10: v1(480,-50) 510,-80 770,-80 820,-130 1020,-130 v1(1080,-190)
NetM2_2: M2.2 U2.37 | length 1005.3
  Top Layer w10: U2.37 428.9,11.1 440,0 490,0 v1@530,-40
  Top Layer w15: M2.2 1158.74,-188.74 v1(1160,-190)
  Bottom Layer w10: v1(540,-40) 560,-60 780,-60 830,-110 1080,-110 v1(1160,-190)
NetM3_1: M3.1 R12.2 U2.38 | length 629.4
  Top Layer w10: U2.38@369.29,30 U2.38 439.21,30.79 450,20 500,20 520,0 M3.1@590,0 ; M3.1@599.74,50.26 629.49,80 650,80 670,100 670,120 690,140 750,140 780,110 890,110 R12.2
NetM3_2: M3.2 U2.39 | length 531.9
  Top Layer w10: U2.39 449.53,50.47 460,40 v1(540,40) ; M3.2@680,10 680,70 v1(710,100)
  Top Layer w15: M3.2@678.74,-91.26 M3.2
  Bottom Layer w10: v1(540,40) 600,40 630,70 710,70 v1(710,100)
NetR1_1: R1.1 U1.8 | length 142.8
  Top Layer w15: U1.8@-300,860 -248.5,911.5 ; -248.5,910 -248.5,911.5 ; R1.1 -248.5,911.5
NetR3_1: R3.1 U2.6 | length 443.6
  Top Layer w10: U2.6 -0.79,129.21 v1(20,150)
  Top Layer w15: v1(-90,310) -71.26,310 10,391.26 R3.1
  Bottom Layer w10: v1(-90,310) -90,260 v1(20,150)
NetU1_1: U1.1 U2.62 | length 666.9
  Top Layer w10: U2.62 41.73,340.32 v1@100,398.58
  Top Layer w15: U1.1 -295,645.32 -257.56,682.76 -223.94,682.76 v1@-220,678.82
  Bottom Layer w10: v1@-216.65,673.35 -113.31,570 -90,570 90,390 v1(100,390)
  other v1: -222.13,682.76
NetU1_4: U1.4 U2.61 | length 557.2
  Top Layer w10: U2.61 61.42,331.42 80,350 110,350 v1@160,400
  Top Layer w15: U1.4@-151.26,623.7 -127.64,600.08 v1(-100.08,600.08)
  Bottom Layer w10: v1@-95.98,604.02 -94.02,604.02 87.09,422.91 127.09,422.91 140,410 v1(160,410)
NetU2_46: U2.46 UART_SWD1.5 | length 401.9
  Top Layer w10: U2.46 428.27,188.27 490,250 490,420 UART_SWD1.5
NetU2_49: U2.49 UART_SWD1.6 | length 191.6
  Top Layer w10: U2.49 U2.49@297.64,327.64 ; U2.49@300,330 330,360 UART_SWD1.6
UART_RTS: TP10.1 U2.54 UART_SWD1.4 | length 310.2
  Top Layer w10: UART_SWD1.4 180,530 180,460 199.21,440.79 U2.54
UART_RX: TP9.1 U2.52 UART_SWD1.3 | length 319.4
  Top Layer w10: U2.52 238.58,348.58 270,380 v1(270,410)
  Bottom Layer w10: UART_SWD1.3 280,530 280,420 v1(270,410)
UART_TX: TP8.1 U2.51 UART_SWD1.2 | length 335.7
  Top Layer w10: U2.51 258.27,338.27 ; 258.27,338.62 310,390.35 310,430 280,460 280,520 UART_SWD1.2@330,570
  Top Layer w15: UART_SWD1.2@330,570 UART_SWD1.2
pads on no net: CAN1.4 CAN1.5 CAN2.4 CAN2.5 E1.4 E1.5 E2.4 E2.5 E3.4 E3.5 ER1.6 ER1.7 ER2.6 ER2.7 I1.3 I1.4 L1.3 L1.4 L2.3 L2.4 L3.3 L3.4 L4.3 L4.4 L5.3 L5.4 L6.3 L6.4 M1.4 M1.5 M2.4 M2.5 M3.4 M3.5 PWR.3 PWR.4 S1.2 S1.3 U1.5 U2.2 U2.3 U2.4 U2.16 U2.17 U2.20 U2.21 U2.22 U2.29 U2.41 U2.50 U2.53 U2.57 U2.58 U2.59 U2.60 Y1.4

## Polygon pours and split planes (outlines as drawn)
+3V3 on Top Layer "Top Layer-+3V3" (solid, remove dead copper, shelved, pour order 3): -780,-100 -810,-130 -810,-530 -760,-580 -440,-580 -400,-540 -400,-130 -430,-100
GND on Bottom Layer "GND" (solid, remove dead copper, shelved, pour order 6): -1050,-1010 1490,-1010 1490,1060 -1050,1060
+3V3 on Bottom Layer "Bottom Layer-+3V3" (solid, shelved, pour order 4): -780,-100 -430,-100 -400,-130 -400,-540 -440,-580 -760,-580 -810,-530 -810,-130

## Silkscreen, mask and mechanical layers (free items; w line width, h text height)
Top Overlay:
  text "Arm Rev 1.0" at -733.94,1155.2 h40
  text "Mars Rover 2019" at -737.87,1064.65 h40

## Text inside footprints (layer, text, board x,y; h text height)
UART_SWD1: Top Overlay "TX" at 319.76,704.09 h40 r270; Top Overlay "RX" at 217.4,704.09 h40 r270; Top Overlay "RTS" at 111.1,732.72 h40 r270; Top Overlay "IO" at 420,420 h40 r270; Top Overlay "CLK" at 310,430 h40 r270; Top Overlay "RST" at 220,430 h40 r270; Top Overlay "VCC" at 422.13,735.67 h40 r270; Top Overlay "GND" at 110,430 h40 r270